# Altium PCB DRL.PcbDoc
Units mil, origin at the board's own origin, x right, y up, seen from the top; angles counter-clockwise.
Board outline 974.41 x 472.44 mil, 2 copper layers (Top Layer, Bottom Layer); 14 components, 8 nets, 30 pads, 2 vias.
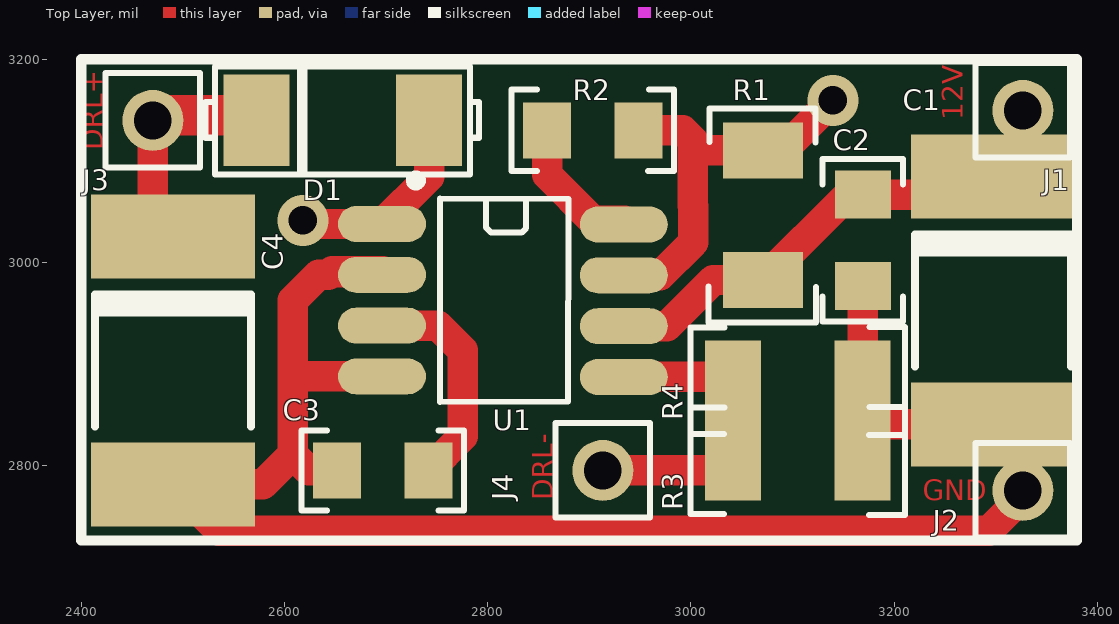
[diagram p0: Top Layer view]
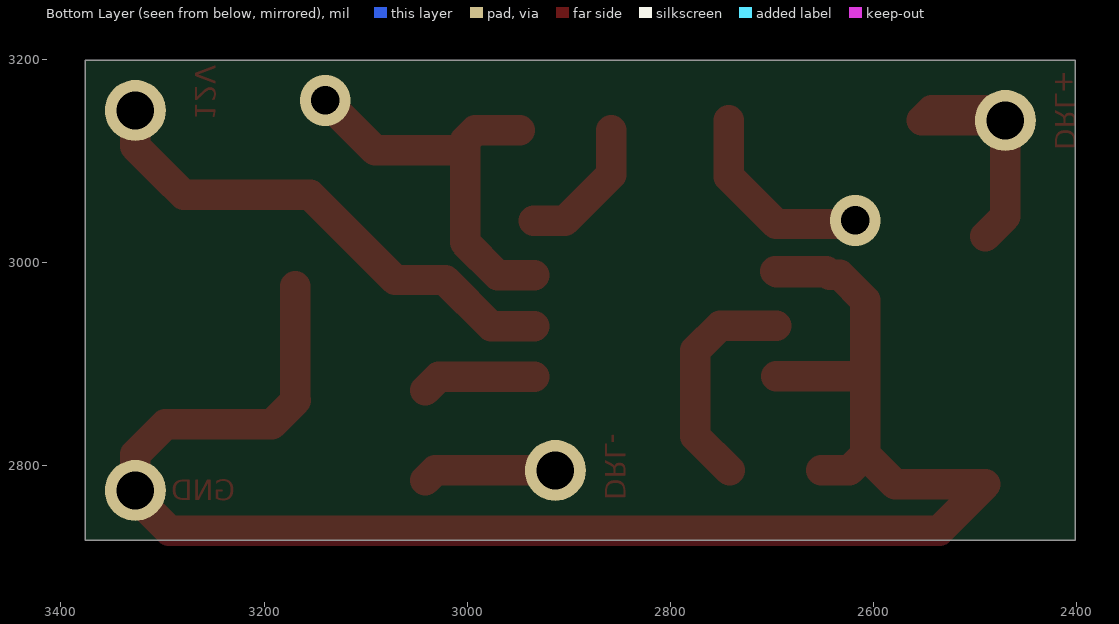
[diagram p1: Bottom Layer view, seen from below]
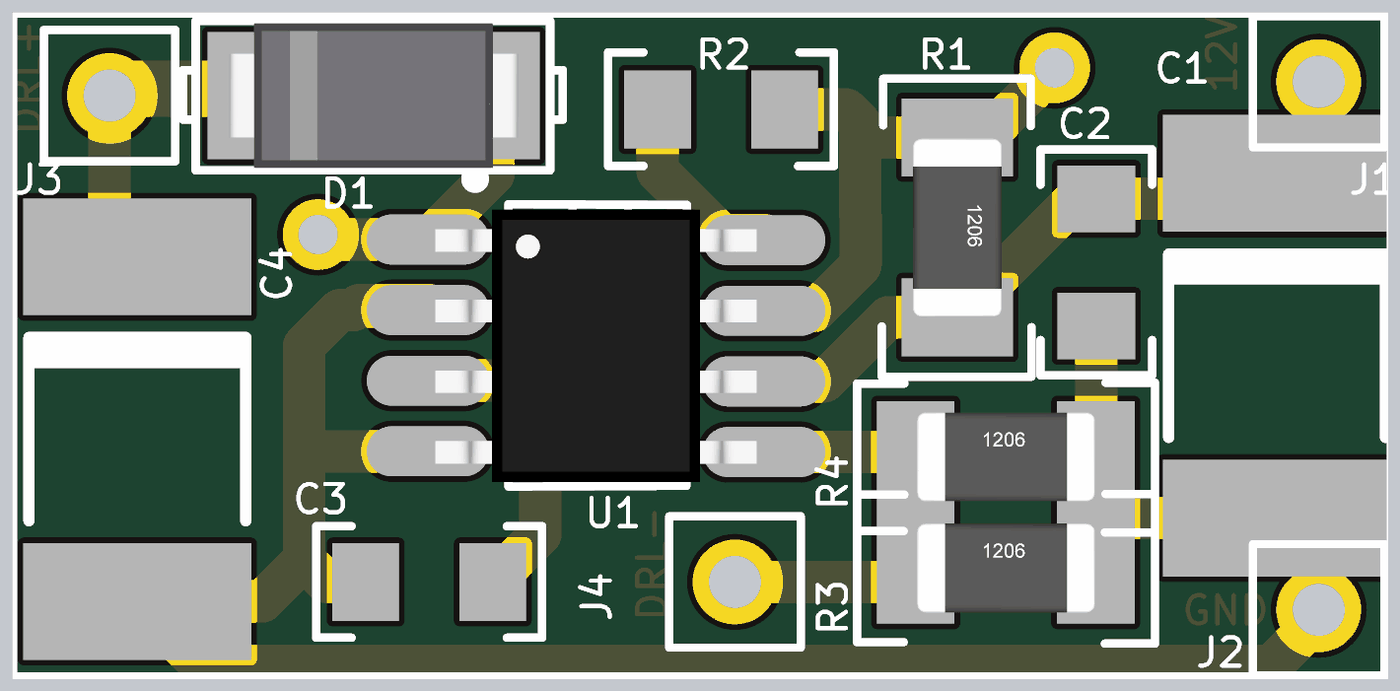
[diagram p2: 3D render of the assembled board from above, using the file's embedded part models]

## Layer stack, top to bottom
Top Layer: signal copper 1.4
Dielectric: dielectric 12.6, FR-4, Dk 4.8
Bottom Layer: signal copper 1.4

## Board outline
2401.57,3198.82 3375.98,3198.82 3375.98,2726.38 2401.57,2726.38

## Design rules (kind name [scope] priority, off if disabled: settings)
Clearance [All] p1: gap=10
ComponentClearance [All] p1 off: gap=10 collisioncheckmode=3 verticalgap=10 showdistances=FALSE
PolygonConnect [All] p1: connectstyle=Relief reliefconductorwidth=10 reliefentries=4 polygonreliefangle="90 Angle"
RoutingVias [All] p1: holewidth=28 width=50 viastyle="Through Hole" minholewidth=28 minwidth=50 maxholewidth=28 maxwidth=50
SilkscreenOverComponentPads [All] p1: minsilkscreentomaskgap=10
SolderMaskExpansion [All] p1: expansion=4
Width [All] p1: maxlimit=50 minlimit=10 preferedwidth=10
26 further rules are at their usual default settings.

## Classes and differential pairs
component class DRL: C1 C2 C3 C4 D1 R1 R2 R3 R4 U1

## Components (designator, comment, footprint, x,y, rotation, side; value= is the part's Value field where it differs from the comment)
C1 "100uF/25V" CAPC7238N 3297.24,2962.6 r270 top
C2 "100n" C0805 3169.29,3021.65 r90 top
C3 "81pF" C0805 2696.85,2795.28 r0 top
C4 "100uF/25V" CAPC7238N 2490.16,2903.54 r270 top
D1 "D" SMA 2657.48,3139.76 r180 top
J1 "12V" PIN 3326.77,3149.61 r0 top
J2 "GND" PIN 3326.77,2775.59 r0 top
J3 "DRL+" PIN 2470.47,3139.76 r0 top
J4 "DRL-" PIN 2913.39,2795.28 r0 top
R1 "R33" R1206 3070.87,3110.24 r270 top
R2 "180" R0805 2903.54,3129.92 r180 top
R3 "R" R1206 3041.34,2805.12 r0 top
R4 "R" R1206 3041.34,2883.86 r0 top
U1 "MC34063AD" SO8 2814.96,2962.6 r0 top

## Footprints (in the part's own frame and the unit in brackets; to place one, negate y for a bottom-side part, rotate by r counter-clockwise, add the part's x,y. Pads: shape width x height; smd on the part's side, far side on the other; paste and mask are expansions set on the pad)
C0805 [mm]
  rect 1.2x1.4 smd: 1(-1.143,0) 2(1.143,0)
  silkscreen extent -2.03,-1 2.03,1, body extent -1,-0.63 1,0.63, height 0.5
CAPC7238N [mm] "Chip Capacitor, Body 7.2x3.8mm, IPC Medium Density"
  rect 2.1x4.1 smd: 1(-3.1,0) 2(3.1,0)
  silkscreen extent -1.65,-1.95 1.65,1.95, body extent -3.8,-2.1 3.8,2.1, height 3.18
PIN [mil]
  round 60 hole 37: 1(0,0)
  silkscreen extent -46,-46 46,46, body extent -13,-13 13,13, height 400
R0805 [mm]
  rect 1.2x1.4 smd: 1(-1.143,0) 2(1.143,0)
  silkscreen extent -2.03,-1.03 2.03,1.02, body extent -1,-0.63 1,0.63, height 0.5
R1206 [mm]
  rect 1.4x2 smd: 1(0,0) 2(3.238,0)
  silkscreen extent -1.05,-1.36 4.31,1.33, body extent 0.03,-0.8 3.23,0.8, height 1
SMA [mil]
  rect 65x90 smd: A(-85,0) C(85,0)
  silkscreen extent -134,-53 135,53, body extent -102,-51 102,51, height 93
SO8 [mm]
  oval 2.2x0.9 smd: 1(-3.023,1.911) 2(-3.023,0.641) 3(-3.023,-0.629) 4(-3.023,-1.899) 5(3.023,-1.911) 6(3.023,-0.641) 7(3.023,0.629) 8(3.023,1.899)
  silkscreen extent -2.3,-2.53 1.64,3.12, body extent -2.89,-2.45 2.89,2.45, height 1.45

## Part data
C1 C4: library part C_EL
C2 C3: library part C
J1 J2 J3 J4: library part PIN
R1 R2: library part R
U1: "DC-to-DC Converter Control Circuit"

## Via types
v1: diameter 50, hole 28, Top Layer to Bottom Layer, 2 vias

## Nets (pads, with @x,y where several pads share a name; then routed paths per layer and width w, separated by ;. In a path a pad name is that pad's centre, name@x,y a point inside that pad or via, vN(x,y) a via of type N, cw(c..) or ccw(c..) an arc to the next point about the centre after c; other vN are vias at no path point)
GND: C1.2 C2.1 C3.1 C4.2 J2.1 R3.2 R4.2 U1.2 U1.4 | length 1778
  Top Layer w10: R4.2@3168.84,2864.17 R4.2@3169.29,2864.63
  Top Layer w25: 2643.36,2987.85 U1.2
  Top Layer w30: C3.1 2624.02,2795.28 2608.27,2811.02 ; U1.4 2612.26,2887.85 2608.27,2883.86 ; U1.2@2696.85,2991.34 2646.85,2991.34 2643.36,2987.85 2633.52,2987.85 2608.27,2962.6 2608.27,2883.86 ; R4.2@3168.84,2864.17 3192.46,2840.55 C1.2 3326.77,2811.02 J2.1 3326.77,2769.5 3293.18,2735.91 2535.75,2735.91 C4.2 2578.74,2781.5 2608.27,2811.02 ; R4.2@3169.29,2864.63 C2.1 ; 2608.27,2811.02 2608.27,2883.86
NetC1_1: C1.1 C2.2 J1.1 R1.2 U1.6 | length 501.5
  Top Layer w30: U1.6 2976.53,2937.35 3021.92,2982.74 R1.2 3154.78,3066.65 C2.2 3279.25,3066.65 C1.1 3326.77,3114.17 J1.1
NetC3_2: C3.2 U1.3 | length 221.8
  Top Layer w30: U1.3 2751.13,2937.85 2775.59,2913.39 2775.59,2829.02 C3.2
NetC4_1: C4.1 D1.C J3.1 | length 295.1
  Top Layer w30: J3.1 2470.47,3045.28 C4.1 ; J3.1@2470.47,3149.61 2480.31,3139.76 2552.8,3139.76 2542.95,3149.61 J3.1@2470.47,3149.61
NetD1_A: D1.A U1.1 | length 195.5
  Top Layer w30: v1@2621.6,3037.85 U1.1 2742.48,3084.37 D1.A
  other v1: 2618.11,3041.34
NetJ4_1: J4.1 R3.1 R4.1 U1.5 | length 244.9
  Top Layer w30: J4.1 3031.5,2795.28 R3.1@3041.34,2785.43 ; U1.5 3028.01,2887.35 R4.1@3041.34,2874.02
NetL1_2: R1.1 R2.1 U1.7 | length 388.1
  Top Layer w30: U1.7 2969.96,2987.35 3002.27,3019.65 3002.27,3055.34 3001.97,3055.64 3001.97,3120.08 2992.13,3129.92 R2.1 ; 3011.81,3110.24 R1.1 3090.55,3110.24 v1(3139.76,3159.45)
NetR2_2: R2.2 U1.8 | length 138.7
  Top Layer w30: R2.2 2858.54,3086.34 2904.04,3040.84 U1.8@2934.85,3040.84

## Silkscreen, mask and mechanical layers (free items; w line width, h text height)
Top Overlay:
  lines w10: 2400,2726.38 2400,3200 3380,3200 3380,2726.38 2400,2726.38

## Dimensions
2400,3200 to 2400,2726.38 on Mechanical 1
2400,3200 to 3380,3200 on Mechanical 1